# Altium PCB PCB_BERRACHED_ZAKARIA_CARTE.PcbDoc
Units mm, origin at the board's own origin, x right, y up, seen from the top; angles counter-clockwise.
Board outline 50 x 40 mm, 2 copper layers (Top Layer, Bottom Layer); 16 components, 13 nets, 50 pads, 0 vias.
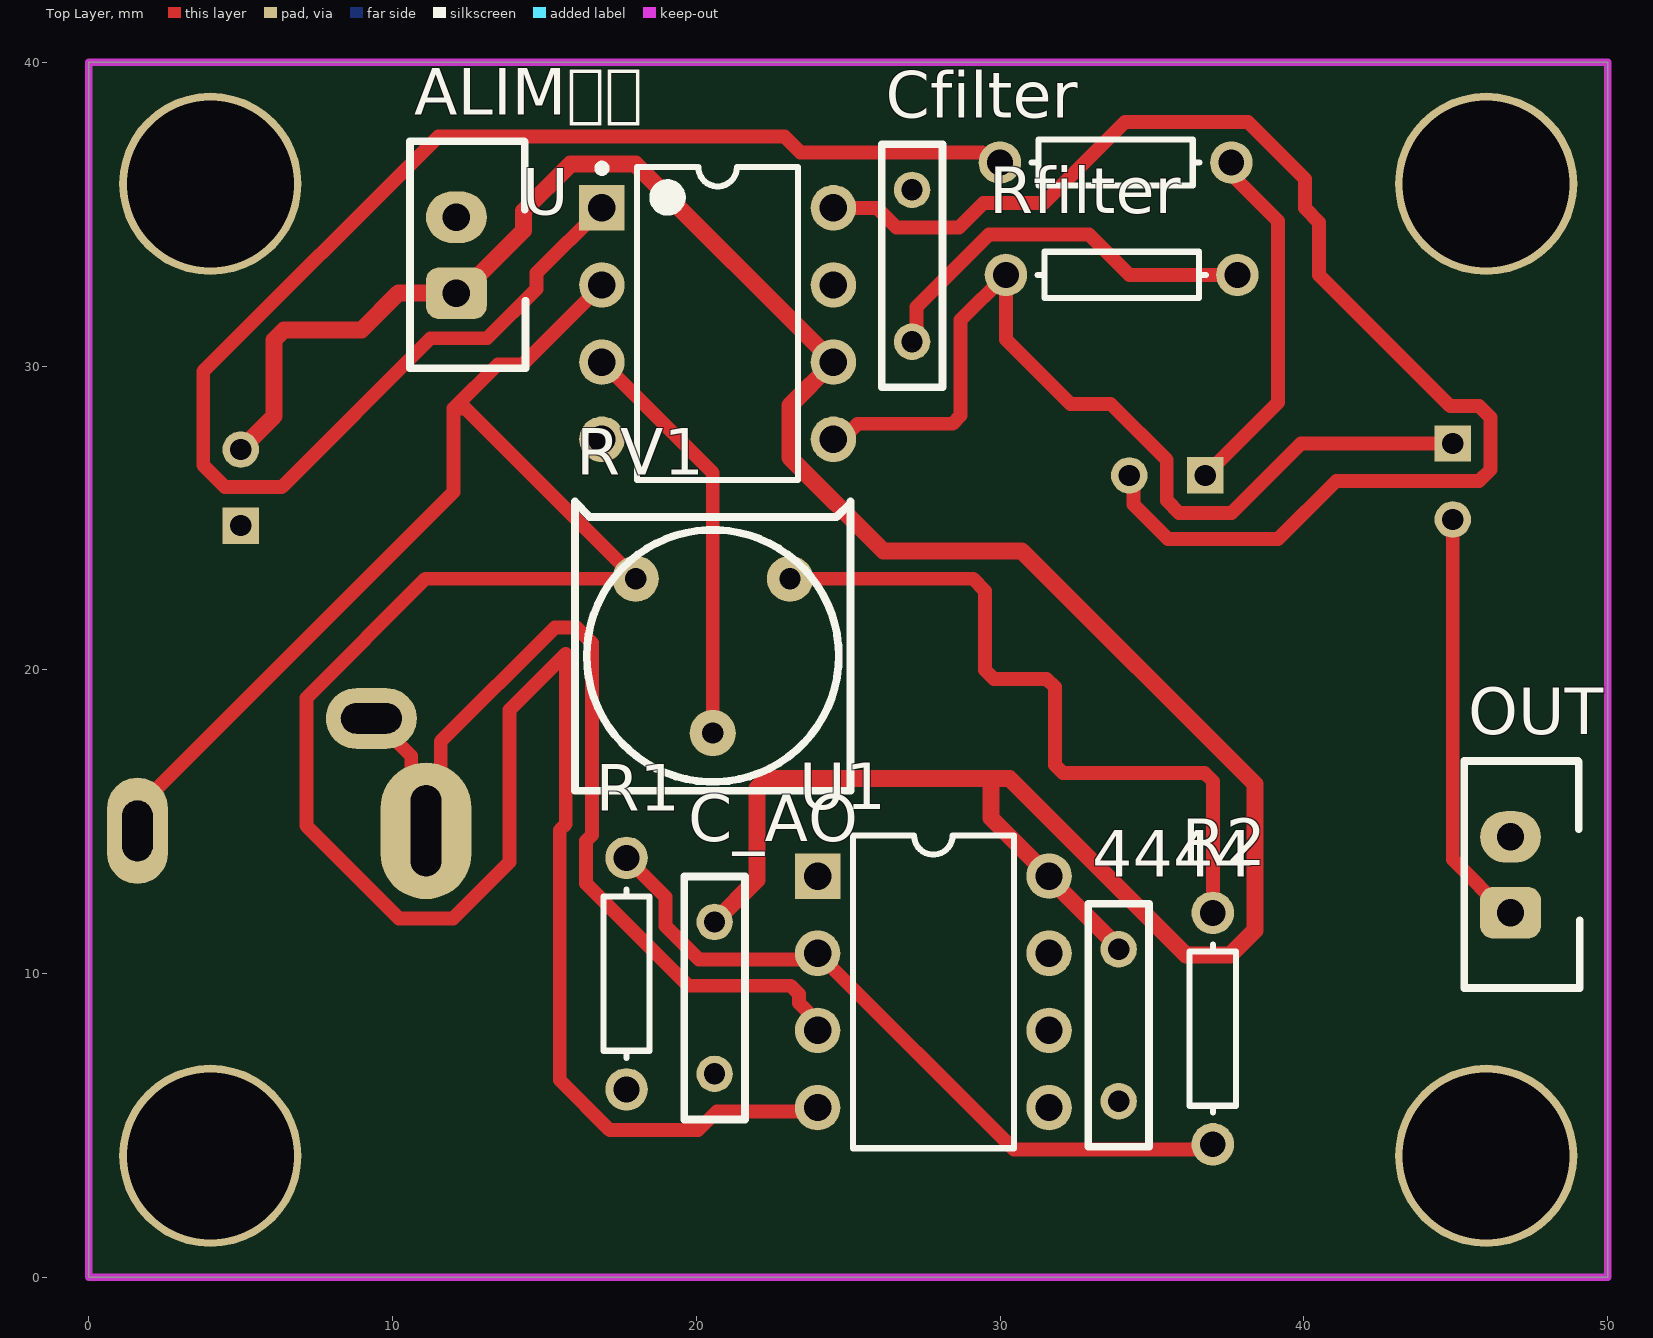
[diagram p0: Top Layer view]
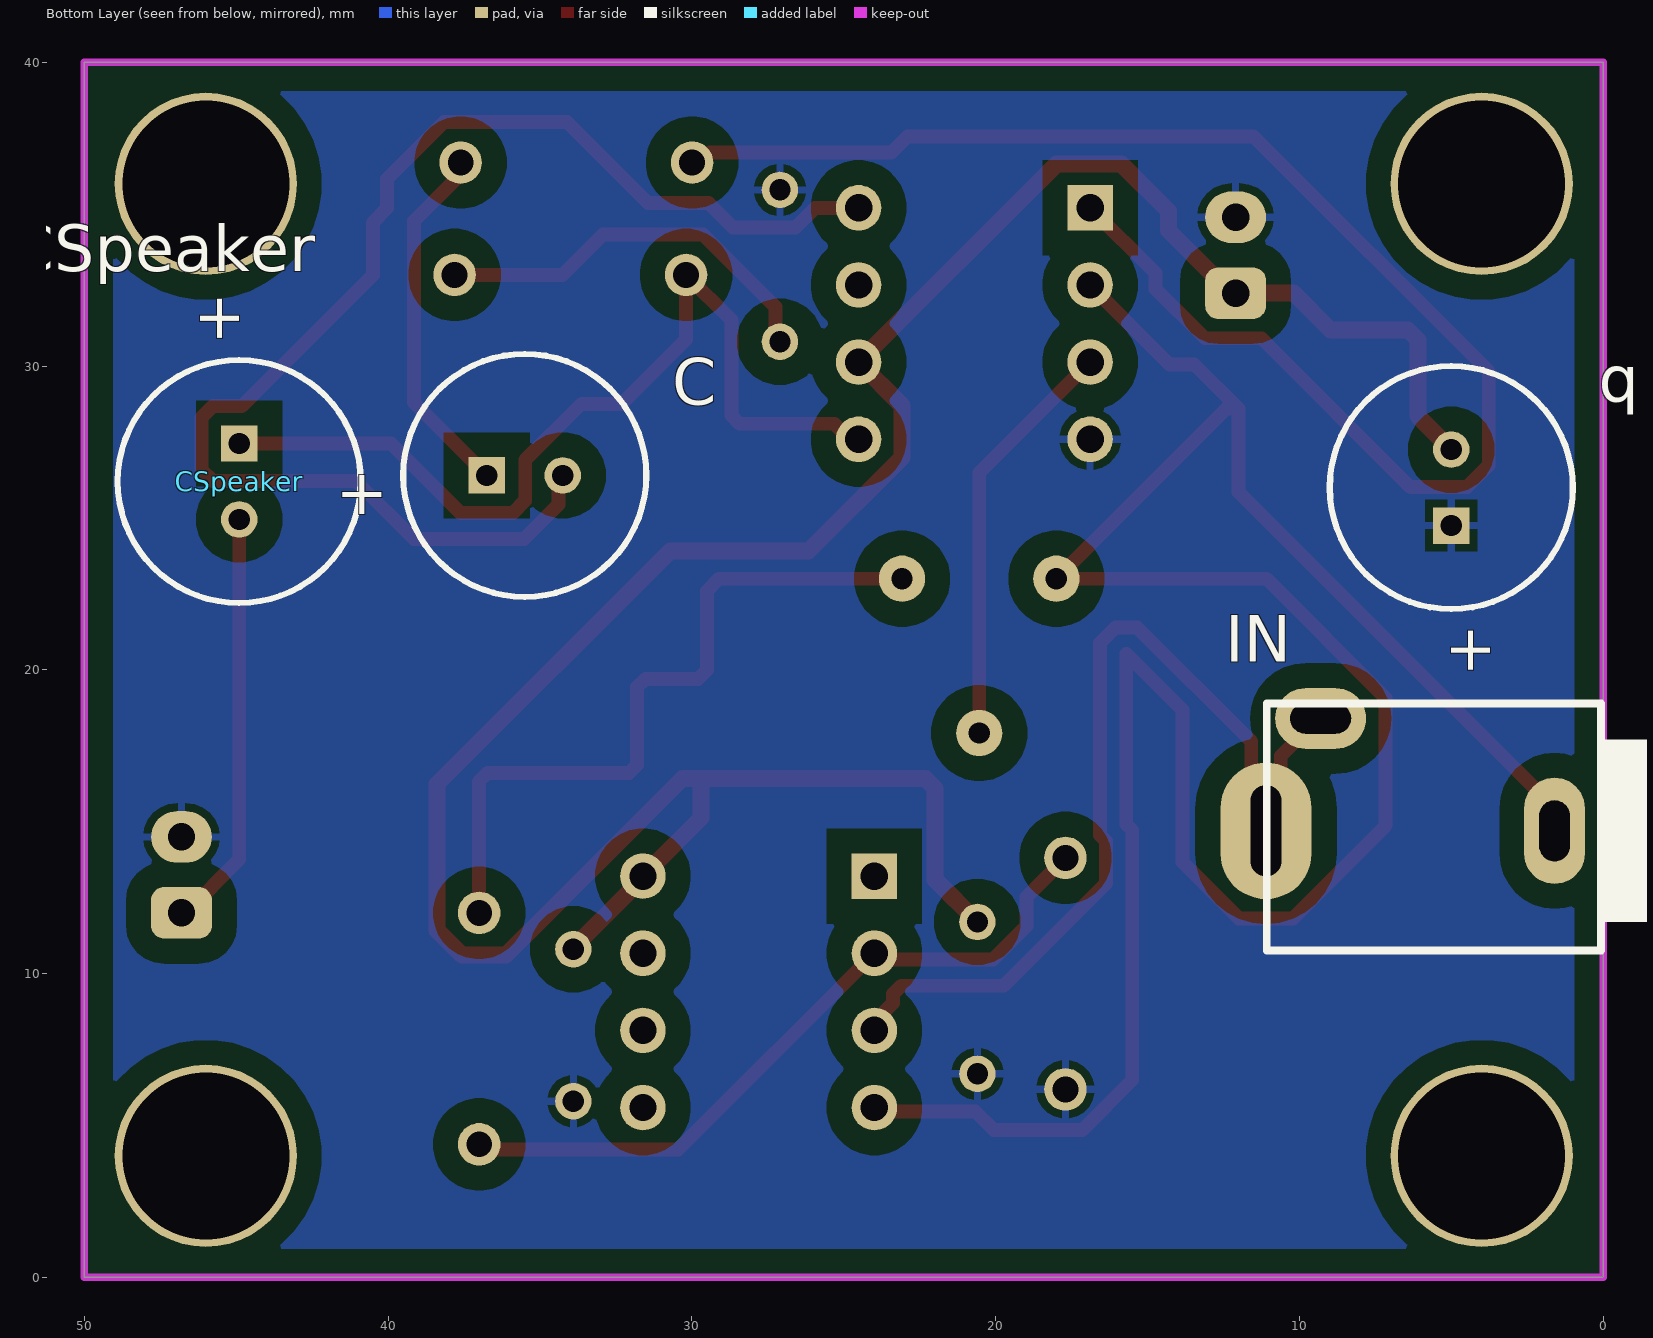
[diagram p1: Bottom Layer view, seen from below]
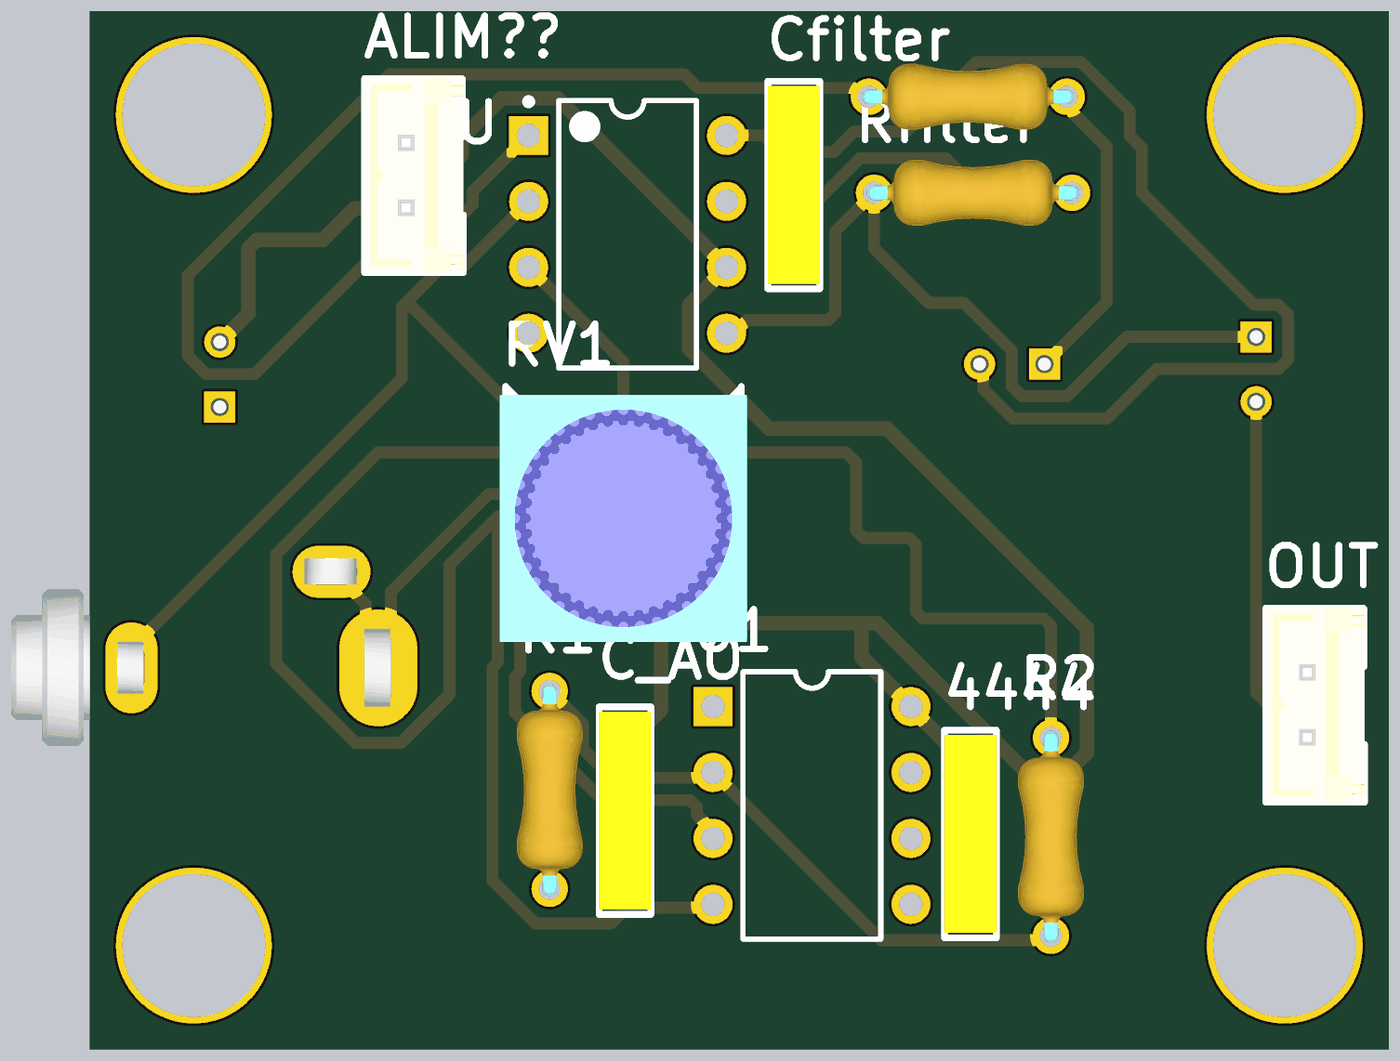
[diagram p2: 3D render of the assembled board from above, using the file's embedded part models]
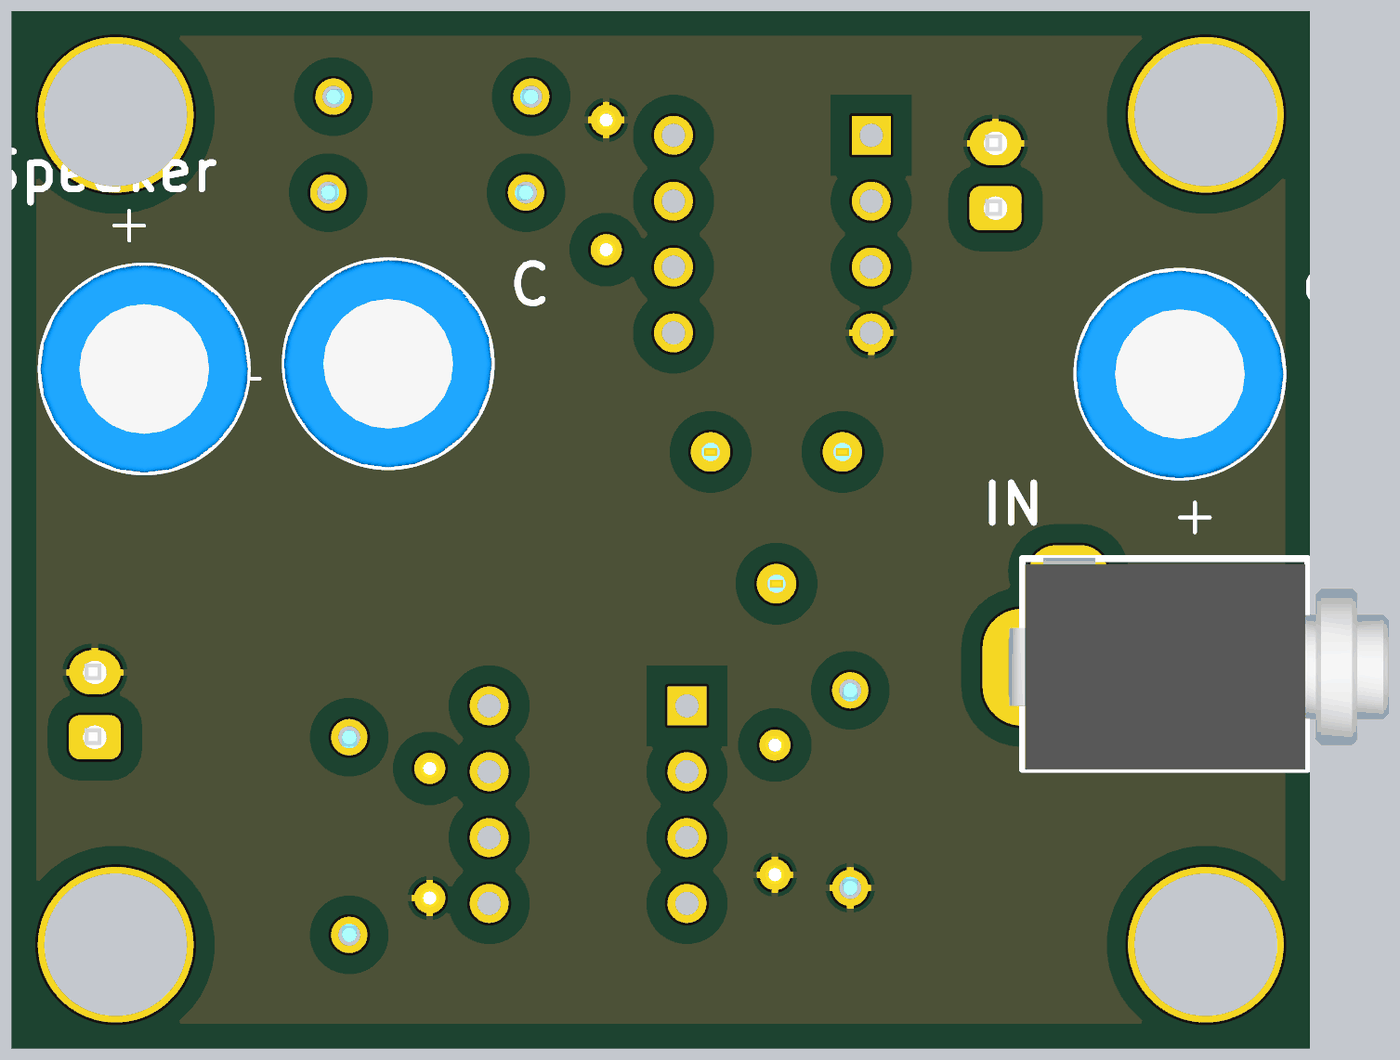
[diagram p3: 3D render of the assembled board from below, using the file's embedded part models]

## Layer stack, top to bottom
Top Solder: solder mask 0.0102, Solder Resist, Dk 3.5
Top Layer: signal copper 0.0356
Dielectric 1: dielectric 0.32, FR-4, Dk 4.8
Bottom Layer: signal copper 0.0356
Bottom Solder: solder mask 0.0102, Solder Resist, Dk 3.5

## Board outline
0,0 50,0 50,40 0,40

## Design rules (kind name [scope] priority, off if disabled: settings)
Clearance [All] p1: gap=0.406 ignorepadtopadclearanceinfootprint=FALSE except(0.813: Arc-Poly Track-Poly SMDPad-Poly THPad-Poly Via-Poly Fill-Poly Poly-Poly)
PolygonConnect [All] p1: connectstyle=Relief reliefconductorwidth=0.254 reliefentries=4 polygonreliefangle="90 Angle" airgapwidth=0.254
RoutingVias [All] p1: holewidth=0.711 width=1.27 viastyle="Through Hole" minholewidth=0.711 minwidth=1.27 maxholewidth=0.711 maxwidth=1.27
SolderMaskExpansion [All] p1: expansion=0.102 istentingtop=FALSE
Width alim [InNet('Vplus')] p1: maxlimit=0.559 minlimit=0.559 preferedwidth=0.559 minimp=50.000000 maximp=50.000000 favimp=50.000000
Width signaux [All] p2: maxlimit=0.457 minlimit=0.457 preferedwidth=0.457 minimp=50.000000 maximp=50.000000 favimp=50.000000
30 further rules are at their usual default settings.

## Classes and differential pairs
component class "schéma éléctrique": 4444 ALIM C CSpeaker OUT q R1 R2 Rfilter RV1 U1

## Components (designator, comment, footprint, x,y, rotation, side; value= is the part's Value field where it differs from the comment)
4444 "Capacitor tantal" "Cap tantal 5mm pitch" 33.9,8.3 r270 top value="330 nF" (schematic designator CU)
ALIM "B2B" B2B-EH 12.1,33.65 r90 top (schematic designator ALIM)
C "Capacitor Axial" "Cap Radial 3mm pitch" 35.5,26.4 r0 bottom value="10 uF"
C_AO "Capacitor tantal" "Cap tantal 5mm pitch" 20.6,9.2 r270 top value="330 nF"
Cfilter "Capacitor tantal" "Cap tantal 5mm pitch" 27.1,33.3 r270 top value="50 nF"
CSpeaker "Capacitor Axial" "Cap Radial 3mm pitch" 44.9,26.2 r90 bottom value="250 uF"
IN "Jack_2.5_mono" jack_2.5_mono_v 0.2,14.7 r0 bottom
OUT "B2B-EH" B2B-EH 46.8,13.25 r90 top
q "" "Cap Radial 3mm pitch" 5,26 r270 bottom value="100 uF" (schematic designator C_Pol_Plus)
R "" AXIAL-0.3 33.8,36.7 r0 top value=1K
R1 "" AXIAL-0.3 17.7,10 r90 top value=1K
R2 "" AXIAL-0.3 37,8.19 r90 top value=10k
Rfilter "" AXIAL-0.3 34,33 r180 top value=10
RV1 "TRIMMER VISHAY_63" "Vishay 63M" 20.54,20.46 r180 top
U "LM386N-1" N08E 20.7,31.4 r0 top
U1 "LM358AJG" JG008 27.8,9.4 r270 top

## Footprints (in the part's own frame and the unit in brackets; to place one, negate y for a bottom-side part, rotate by r counter-clockwise, add the part's x,y. Pads: shape width x height; smd on the part's side, far side on the other; paste and mask are expansions set on the pad)
AXIAL-0.3 [mm] "Axial Device, Thru-Hole; 2 Leads; 0.3 in Pin Spacing"
  round 1.4 hole 0.85: 1(-3.81,0) 2(3.81,0)
  silkscreen extent -2.77,-0.76 2.77,0.76, body extent -4.09,-1.27 4.09,1.27, height 2.64
B2B-EH [mm]
  rrect50% 1.7x2 hole 0.9: 1(-1.25,0)
  oval 1.7x2 hole 0.9: 2(1.25,0)
  silkscreen extent -3.72,-2.27 3.75,1.53, body extent -3.72,-2.27 3.78,1.53, height 6
"Cap Radial 3mm pitch" [mm] "Polarized Capacitor (Radial); 2 Leads"
  rect 1.2x1.2 hole 0.7: 1(1.25,0)
  round 1.2 hole 0.7: 2(-1.25,0)
  silkscreen extent -4,-4 4,4, body extent -4,-4 4,4, height 11.6
"Cap tantal 5mm pitch" [mm] "Polarized Capacitor (Radial); 2 Leads"
  round 1.2 hole 0.7: 1(2.5,0) 2(-2.5,0)
  silkscreen extent -4,-1 4,1, body extent -3.81,-1 3.81,1, height 6
jack_2.5_mono_v [mm]
  oval 3x4.5 hole 1 slot 3 at 90 deg: 1(10.9,0)
  oval 2x3.5 hole 1 slot 2 at 90 deg: 2(1.4,0)
  oval 3x2 hole 1 slot 2 at 0 deg: 3(9.1,-3.7)
  silkscreen extent -3.24,-4.19 10.87,3.94, body extent -3.24,-4.21 11.36,3.94, height 9
JG008 [mm] "DIP; 8 Leads; Row Spacing 7.62 mm; Pitch 2.54 mm"
  rect 1.5x1.5 hole 0.9: 1(-3.81,-3.81)
  round 1.5 hole 0.9: 2(-1.27,-3.81) 3(1.27,-3.81) 4(3.81,-3.81) 5(3.81,3.81) 6(1.27,3.81) 7(-1.27,3.81) 8(-3.81,3.81)
  silkscreen extent -5.15,-2.65 5.15,2.65
N08E [mm] "DIP, 8-Leads, Row Spacing 7.62mm, Pitch 2.54mm, Body 9.91x6.35mm"
  rect 1.5x1.5 hole 0.9: 1(-3.81,3.81)
  round 1.5 hole 0.9: 2(-3.81,1.27) 3(-3.81,-1.27) 4(-3.81,-3.81) 5(3.81,-3.81) 6(3.81,-1.27) 7(3.81,1.27) 8(3.81,3.81)
  silkscreen extent -3.93,-5.15 2.65,5.23, body extent -3.6,-5.15 3.6,5.15, height 5.34
"Vishay 63M" [mil]
  round 60 hole 27.56: 1(-100,-100) 2(0,100) 3(100,-100)
  silkscreen extent -179,-200 178,175, body extent -187,-187 187,187, height 410

## Part data
4444 C_AO Cfilter: "Capacitor", LatestRevisionDate=29-May-2009, LatestRevisionNote="IPC-7351 Footprint Added.", PackageDescription="Chip Capacitor", PackageReference=C0805, Published=8-Jun-2000, Publisher="Altium Limited"
ALIM: library part B2B-EH, "2 pins, 2.5mm pitch", Supplier 1=RSComponents
C CSpeaker: "Polarized Capacitor (Axial)", LatestRevisionDate=17-Jul-2002, LatestRevisionNote="Re-released for DXP Platform.", PackageDescription="Polarized Capacitor; 2 Leads", PackageReference=POLAR0.8, Published=8-Jun-2000, Publisher="Altium Limited"
IN: "1501_09", Supplier Part Number 1=2472271, Supplier 1=Farnell
OUT: "2 pins, 2.5mm pitch", Supplier 1=RSComponents
q: library part "Capacitor Axial", "Polarized Capacitor (Axial)", LatestRevisionDate=17-Jul-2002, LatestRevisionNote="Re-released for DXP Platform.", PackageDescription="Polarized Capacitor; 2 Leads", PackageReference=POLAR0.8, Published=8-Jun-2000, Publisher="Altium Limited"
R R1 R2 Rfilter: library part Resistor, "Resistor", LatestRevisionDate=29-May-2009, LatestRevisionNote="IPC-7351 Footprint Added.", PackageDescription="Chip Resistor", PackageReference=J1-0603, Published=8-Jun-2000, Publisher="Altium Limited"
RV1: "Variable resistor", Supplier Part Number 1=9608230, Supplier 1=Farnell, Supplier 2=Farnell, Supplier Part Number 2=1846609
U: "Low Voltage Audio Power Amplifier, 8-pin MDIP", Manufacturer="National Semiconductor", PackageTopMarking=NSUZXYTTE#*LM*386N-1, PowerWise=N, Supplier Part Number 1=9488332, Code_JEDEC=MS-001-BA, ComponentLink1Description="LM386 Datasheet", ComponentLink1URL=http://www.national.com/ds/LM/LM386.pdf, ComponentLink2Description="LM386 Web Page", ComponentLink2URL=http://www.national.com/pf/LM/LM386.html, ComponentLink3Description="N08E Package Page", ComponentLink3URL=http://www.national.com/packaging/folders/n08e.html, CompType="Audio IC", DatasheetVersion=Aug-2000, PackageDescription="MDIP, .365 x .250 x .130in, 8 Lead, .100in Pitch", PackageReference=N08E, PackageVersion="revG, May-2006", PartNumber=LM386N-1, PinCount=8, Published=4-Dec-2008, Publisher="Altium Limited", RoHS=N, Supplier 1=Farnell
U1: "Dual Operational Amplifier", ComponentLink1Description="Manufacturer Link", ComponentLink1URL=http://www.ti.com/, DatasheetVersion=Aug-1988, LatestRevisionDate=04-Mar-2005, LatestRevisionNote="Stylized 3D Model Added.", PackageDescription="DIP; 8 Leads; Row Spacing 7.62 mm; Pitch 2.54 mm", PackageReference=JG008, PackageVersion=Jan-1995, Published=15-Apr-2002, Publisher="Altium Limited"

## Free pads (board coordinates)
  round 6 hole 5.5: 3(4,36) 4(46,4) 6(46,36) q(4,4)

## Nets (pads, with @x,y where several pads share a name; then routed paths per layer and width w, separated by ;. In a path a pad name is that pad's centre, name@x,y a point inside that pad or via, vN(x,y) a via of type N, cw(c..) or ccw(c..) an arc to the next point about the centre after c; other vN are vias at no path point)
GND: 4444.1 ALIM.2 C_AO.1 Cfilter.2 OUT.2 q.1 R1.1 U.4 | length 0.2
  Top Layer w0.457: Cfilter.2@26.958,35.942 Cfilter.2
NetC_1: C.1 R.2 | length 12.2
  Top Layer w0.457: C.1 39.145,28.795 39.145,34.774 37.79,36.129 37.79,36.52 R.2
  Bottom Layer w0.457: C.1@36.65,26.3 C.1@36.65,26.4 ; C.1@36.65,26.5 C.1
NetC_2: C.2 U.8 | length 44.8
  Top Layer w0.457: U.8 24.512,35.208 25.946,35.208 26.588,34.565 28.646,34.565 29.446,35.365 31.441,35.365 34.111,38.035 38.163,38.035 40.034,36.164 40.034,35.199 40.5,34.732 40.5,33 44.815,28.685 45.763,28.685 46.135,28.313 46.135,26.587 45.763,26.215 41.064,26.215 39.15,24.301 35.529,24.301 34.392,25.439 34.392,26.258 C.2
NetCfilter_1: Cfilter.1 Rfilter.1 | length 13.5
  Top Layer w0.457: Cfilter.1 27.242,30.942 27.242,31.94 29.637,34.335 32.928,34.335 34.263,33 Rfilter.1
  Bottom Layer w0.457: Cfilter.1@27,30.5 Cfilter.1@27.142,30.642
NetCSpeaker_1: CSpeaker.1 Rfilter.2 U.5 | length 30.9
  Top Layer w0.457: U.5 24.792,27.59 25.302,28.1 28.432,28.1 28.7,28.368 28.7,31.51 Rfilter.2 30.19,30.878 32.312,28.756 33.641,28.756 35.485,26.912 35.485,25.567 35.887,25.165 37.613,25.165 39.898,27.45 CSpeaker.1
  Bottom Layer w0.457: Rfilter.2@30.01,32.82 Rfilter.2
NetCSpeaker_2: CSpeaker.2 OUT.1 | length 13.8
  Top Layer w0.457: CSpeaker.2 44.9,13.75 46.65,12 OUT.1
NetIN_1: IN.1 IN.3 U1.3 | length 32.4
  Top Layer w0.457: IN.3 9.383,18.4 10.613,17.169 10.613,15.187 IN.1 11.583,15.183 11.583,17.636 15.342,21.395 16.058,21.395 16.564,20.889 16.564,14.562 16.365,14.363 16.365,12.967 19.731,9.601 23.1,9.601 23.373,9.329 23.373,9.03 23.99,8.412 U1.3
NetIN_2: IN.2 RV1.3 U1.4 U.2 | length 90
  Top Layer w0.457: IN.2 1.6,15.45 12.01,25.86 12.01,28.6 ; U.2 14.271,30.051 13.461,30.051 12.01,28.6 ; U1.4 23.865,5.465 20.67,5.465 20.06,4.855 17.147,4.855 15.501,6.501 15.501,14.721 15.7,14.919 15.7,20.531 13.842,18.673 13.842,13.673 11.984,11.815 10.216,11.815 7.165,14.866 7.165,19.077 11.088,23 RV1.3 12.4,28.6 12.01,28.6
  Bottom Layer w0.457: U1.4@23.829,5.59 U1.4 U1.4@23.865,5.465
NetR1_2: R1.2 R2.1 U1.2 | length 24.2
  Top Layer w0.457: R1.2 18.984,12.526 18.984,11.569 20.088,10.465 23.503,10.465 23.708,10.67 U1.2 30.455,4.205 R2.1@36.825,4.205 ; R2.1@36.857,4.38 R2.1
  Bottom Layer w0.457: R2.1@36.825,4.205 R2.1
NetR2_2: R2.2 RV1.1 | length 24
  Top Layer w0.457: RV1.1 29.1,23 29.5,22.6 29.5,20 29.8,19.7 31.532,19.7 31.8,19.432 31.8,16.868 32.068,16.6 36.732,16.6 37,16.332 R2.2
NetR_1: R.1 U.1 | length 51.4
  Top Layer w0.457: R.1 29.735,36.7 29.4,37.035 23.424,37.035 22.899,37.56 11.509,37.56 3.765,29.816 3.765,26.738 4.488,26.015 6.351,26.015 11.251,30.915 13.114,30.915 14.741,32.542 14.741,33.061 U.1 ; U.1 16.89,35.731 U.1
NetRV1_2: RV1.2 U.3 | length 13.7
  Top Layer w0.457: U.3 20.54,26.48 RV1.2
Vplus: 4444.2 ALIM.1 C_AO.2 q.2 U1.8 U.6 | length 88.2
  Top Layer w0.559: q.2 6.1,28.35 6.1,30.858 6.427,31.186 8.973,31.186 10.187,32.4 ALIM.1 12.249,32.4 14.313,34.463 14.313,35.103 15.856,36.646 17.994,36.646 U.6 23.074,28.694 23.074,26.995 26.155,23.914 30.711,23.914 38.386,16.24 38.386,11.426 37.574,10.614 36.12,10.614 30.308,16.426 29.7,16.426 ; C_AO.2 21.988,13.088 ; 22,13.1 21.988,13.088 ; 4444.2@33.895,10.805 4444.2 33.9,10.86 31.61,13.15 U1.8 29.7,15.12 29.7,16.426 ; 21.988,13.088 21.988,16.099 22.315,16.426 29.7,16.426
  Bottom Layer w0.559: ALIM.1 ALIM.1@12.25,32.4 ; C_AO.2 C_AO.2@20.723,11.823
pads on no net: U1.1 U1.5 U1.6 U1.7 U.7

## Polygon pours and split planes (outlines as drawn)
GND on Bottom Layer "GND_L02_P035" (solid, remove dead copper, pour order 35): 0,40 50,40 50,0.2 49.8,0 0,0
GND on Bottom Layer "GND_L02_P036" (solid, remove dead copper, pour order 36): 0,40 50,40 50,0 0,0

## Keep-outs
Keep-Out Layer:
  the board outline again, w0.254

## Silkscreen, mask and mechanical layers (free items; w line width, h text height)
Route Tool Path:
  lines w2: -1,0 ccw(c0,0) 0,-1 ; -1,0 ccw(c0,0) 0,-1 ; -1,0 ccw(c0,0) 0,-1 ; -1,0 ccw(c0,0) 0,-1 ; -1,0 ccw(c0,0) 0,-1 ; -1,0 ccw(c0,0) 0,-1 ; -1,0 ccw(c0,0) 0,-1 ; -1,0 ccw(c0,0) 0,-1 ; -1,0 ccw(c0,0) 0,-1 ; -1,0 ccw(c0,0) 0,-1 ; -1,0 ccw(c0,0) 0,-1 ; -1,0 ccw(c0,0) 0,-1 ; -1,0 ccw(c0,0) 0,-1 ; -1,0 ccw(c0,0) 0,-1 ; -1,0 -1,40 ; -1,0 -1,40 ; -1,0 -1,40 ; -1,0 -1,40 ; -1,0 -1,40 ; -1,0 -1,40 ; -1,0 -1,40 ; -1,40 cw(c0,40) 0,41 ; -1,40 cw(c0,40) 0,41 ; -1,40 cw(c0,40) 0,41 ; -1,40 cw(c0,40) 0,41 ; -1,40 cw(c0,40) 0,41 ; -1,40 cw(c0,40) 0,41 ; -1,40 cw(c0,40) 0,41 ; -1,40 cw(c0,40) 0,41 ; -1,40 cw(c0,40) 0,41 ; -1,40 cw(c0,40) 0,41 ; -1,40 cw(c0,40) 0,41 ; -1,40 cw(c0,40) 0,41 ; -1,40 cw(c0,40) 0,41 ; -1,40 cw(c0,40) 0,41 ; 0,-1 50,-1 ; 0,-1 50,-1 ; 0,-1 50,-1 ; 0,-1 50,-1 ; 0,-1 50,-1 ; 0,-1 50,-1 ; 0,-1 50,-1 ; 0,41 50,41 ; 0,41 50,41 ; 0,41 50,41 ; 0,41 50,41 ; 0,41 50,41 ; 0,41 50,41 ; 0,41 50,41 ; 50,-1 ccw(c50,0) 51,0 ; 50,-1 ccw(c50,0) 51,0 ; 50,-1 ccw(c50,0) 51,0 ; 50,-1 ccw(c50,0) 51,0 ; 50,-1 ccw(c50,0) 51,0 ; 50,-1 ccw(c50,0) 51,0 ; 50,-1 ccw(c50,0) 51,0 ; 50,-1 ccw(c50,0) 51,0 ; 50,-1 ccw(c50,0) 51,0 ; 50,-1 ccw(c50,0) 51,0 ; 50,-1 ccw(c50,0) 51,0 ; 50,-1 ccw(c50,0) 51,0 ; 50,-1 ccw(c50,0) 51,0 ; 50,-1 ccw(c50,0) 51,0 ; 50,41 cw(c50,40) 51,40 ; 50,41 cw(c50,40) 51,40 ; 50,41 cw(c50,40) 51,40 ; 50,41 cw(c50,40) 51,40 ; 50,41 cw(c50,40) 51,40 ; 50,41 cw(c50,40) 51,40 ; 50,41 cw(c50,40) 51,40 ; 50,41 cw(c50,40) 51,40 ; 50,41 cw(c50,40) 51,40 ; 50,41 cw(c50,40) 51,40 ; 50,41 cw(c50,40) 51,40 ; 50,41 cw(c50,40) 51,40 ; 50,41 cw(c50,40) 51,40 ; 50,41 cw(c50,40) 51,40 ; 51,0 51,40 ; 51,0 51,40 ; 51,0 51,40 ; 51,0 51,40 ; 51,0 51,40 ; 51,0 51,40 ; 51,0 51,40

## Dimensions
4,4 to 0,0 on Route Tool Path
4,4 to 0,0 on Route Tool Path
0,40 to 50,40 on Route Tool Path
4,36 to 46,36 on Route Tool Path
4,36 to 4,4 on Route Tool Path
0,40 to 0,0 on Route Tool Path

## Text inside footprints (layer, text, board x,y; h text height)
C: Bottom Overlay "+" at 40,26.4 h1.5 r180
CSpeaker: Bottom Overlay "+" at 44.9,30.7 h1.5 r270
q: Bottom Overlay "+" at 5,21.5 h1.5 r90